# Allegro board GroupV_PCBLayout_EDP2.brd
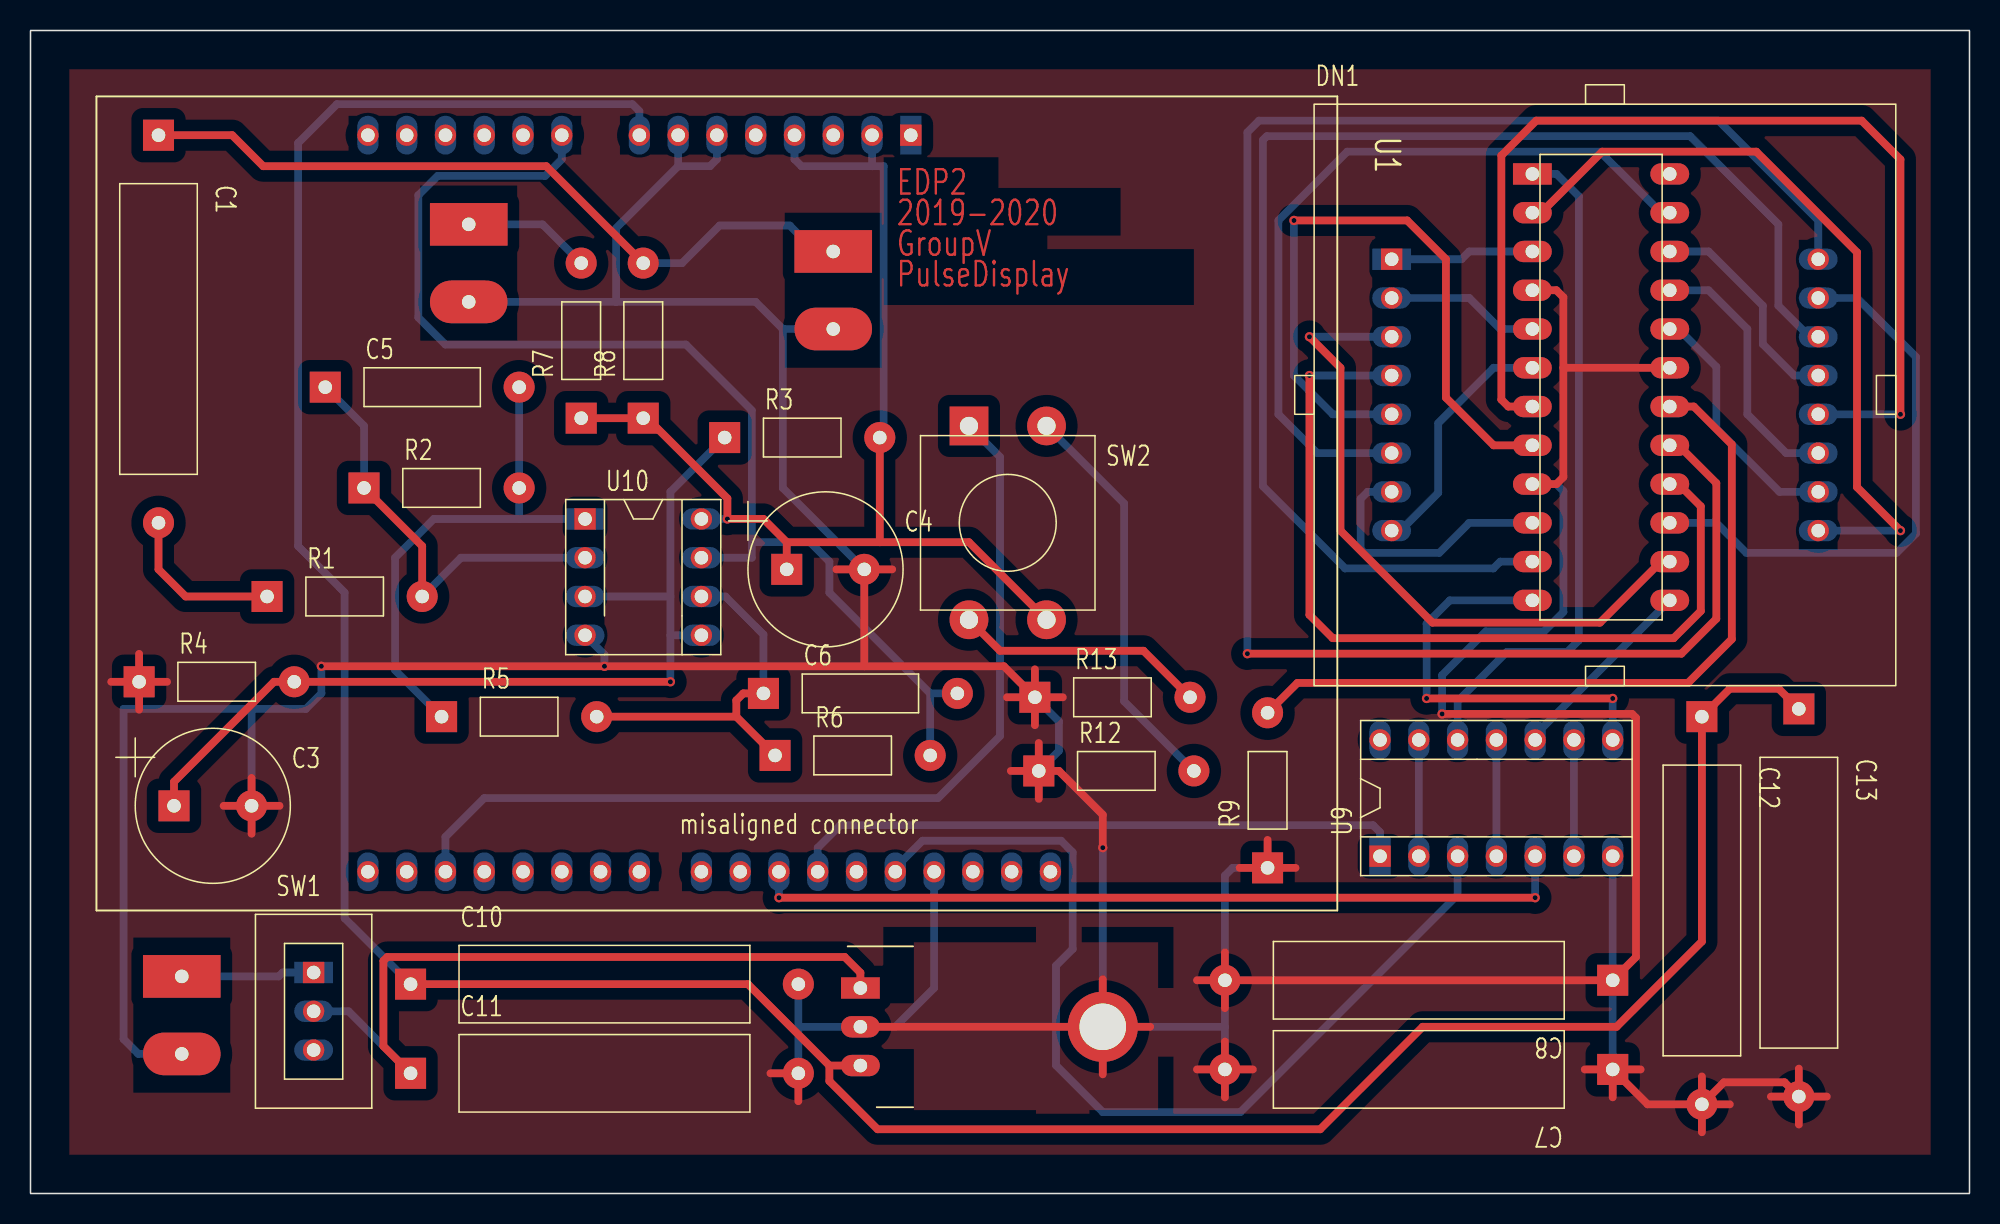
[diagram p0: board, top side]
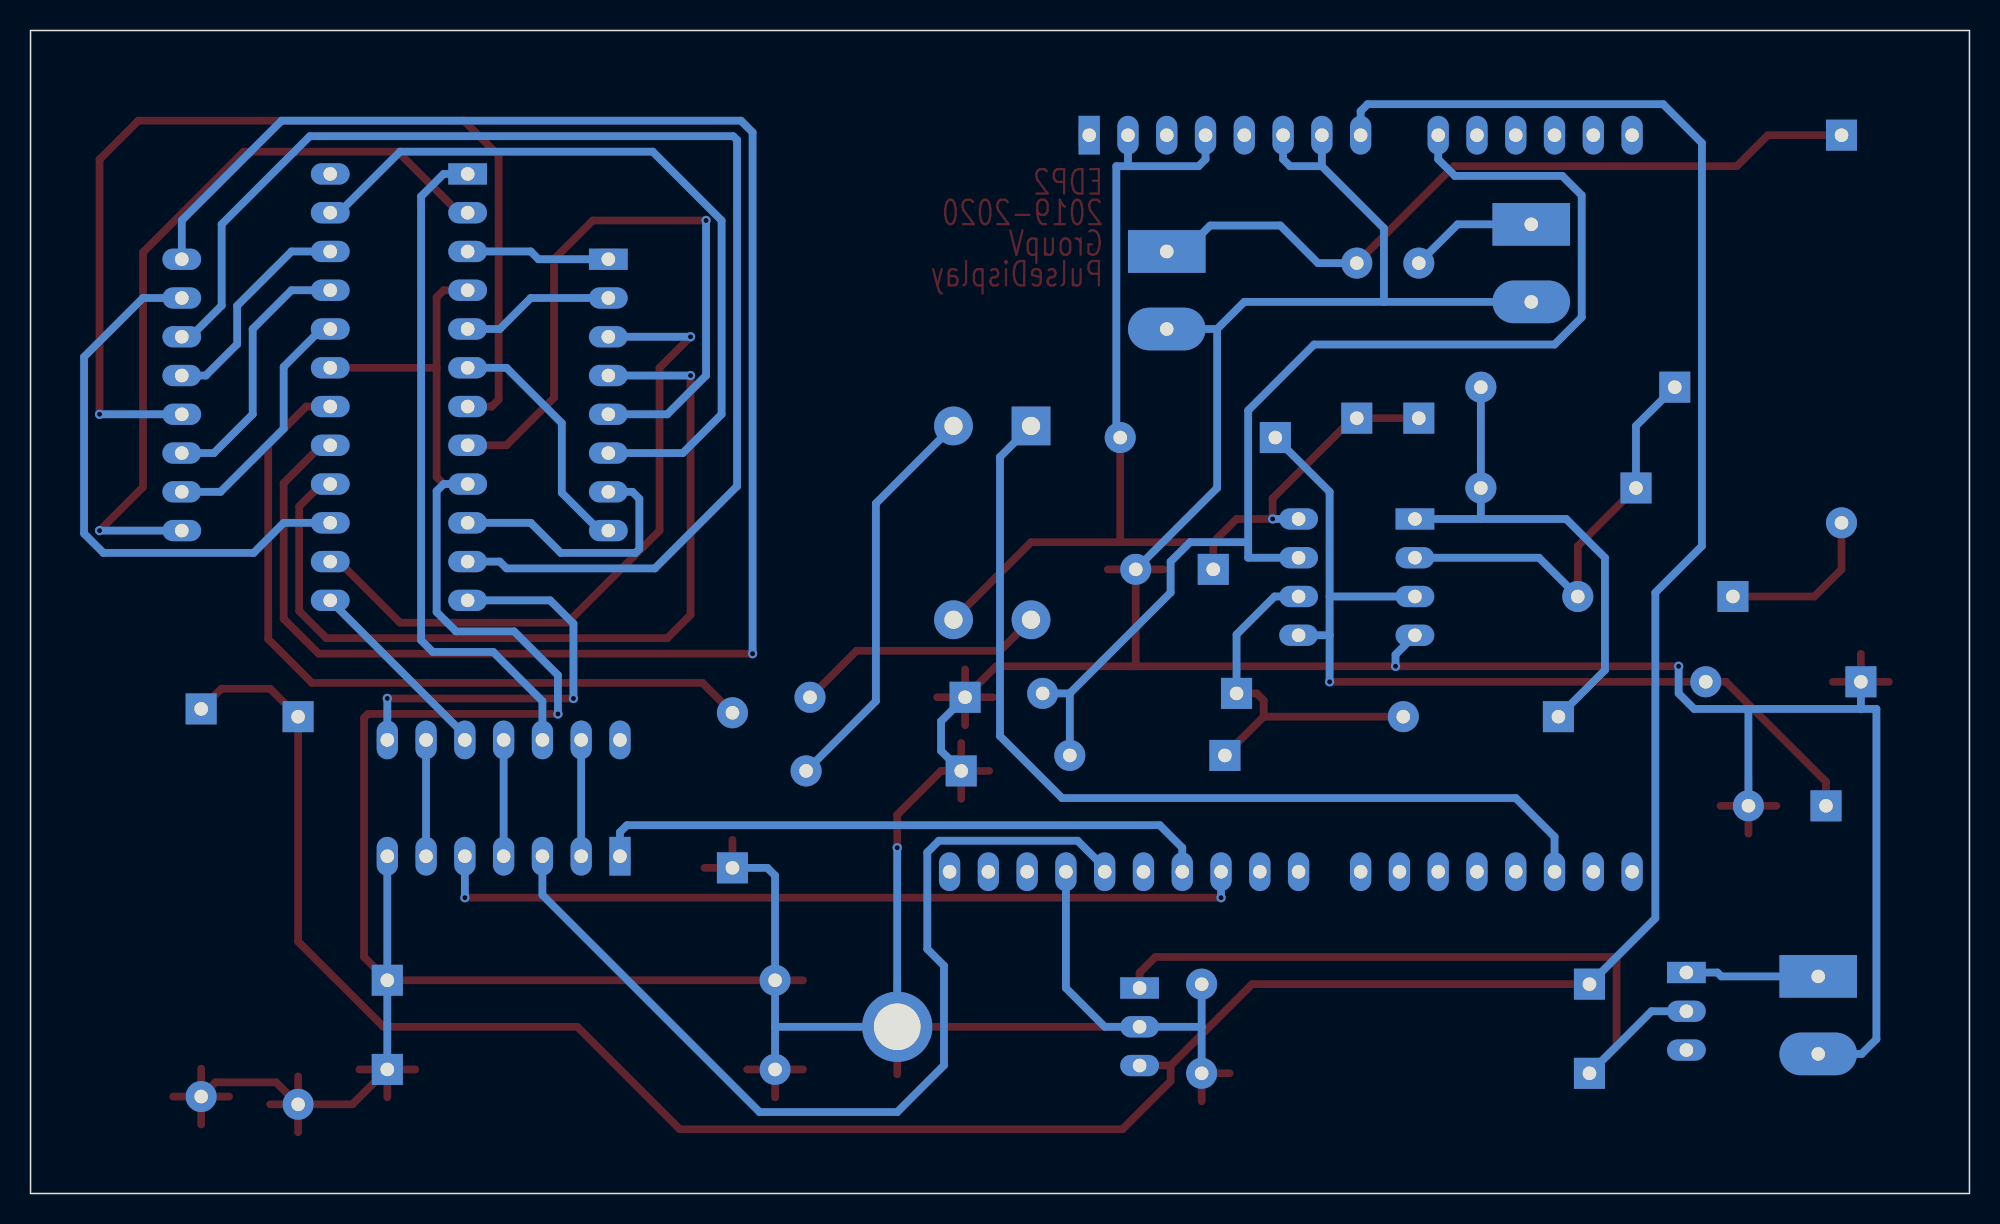
[diagram p1: board, bottom side, seen from below]

Outline 127 x 76.2 mm; copper layers: TOP, BOTTOM. Coordinates in mm from the lower left corner of the outline.
Outline path: rectangle 0,0 127,76.2

## Design rules (mm)
constraint set DEFAULT: min track width 0.508

## Placement (name value [footprint] x y rotation side)
C1  1u  [GU-RC1000]  8.38 69.34 270 top
C3  220U  [GU-CAPCYL200]  9.4 25.4 0 top
C4  220U  [GU-CAPCYL200]  49.53 40.89 0 top
C5  1n  [GU-RC500]  19.3 52.83 0 top
C6  1n  [GU-RC500]  48.01 32.77 0 top
C7  1n  [GU-RC1000]  103.63 8.13 180 top
C8  1n  [GU-RC1000]  103.63 13.97 180 top
C10  220u  [GU-RC1000]  24.89 13.72 0 top
C11  0.1u  [GU-RC1000]  24.89 7.87 0 top
C12  0.1u  [GU-RC1000]  109.47 31.24 270 top
C13  10u  [GU-RC1000]  115.82 31.75 270 top
DN1  LedArr-8x8  [GU-DIPLONG16-1100]  89.15 61.21 0 top
J1  BATTERY 9V  [GU-TERMINAL2-200]  9.91 14.22 0 top
J2  LED  [GU-TERMINAL2-200]  28.7 63.5 0 top
J3  PhotoDiode  [GU-TERMINAL2-200]  52.58 61.72 0 top
R1  10k  [GU-RC400]  15.49 39.12 0 top
R2  50k  [GU-RC400]  21.84 46.23 0 top
R3  100k  [GU-RC400]  45.47 49.53 0 top
R4  100k  [GU-RC400]  7.11 33.53 0 top
R5  1k  [GU-RC400]  26.92 31.24 0 top
R6  50k  [GU-RC400]  48.77 28.7 0 top
R7  100  [GU-RC400]  36.07 50.8 90 top
R8  10k  [GU-RC400]  40.13 50.8 90 top
R9  1k  [GU-RC400]  81.03 21.34 90 top
R12  1k  [GU-RC400]  66.04 27.69 0 top
R13  1k  [GU-RC400]  65.79 32.51 0 top
SW1  SW_SL_SPDT  [GU-SW-SLIDE-SPDT]  18.54 14.48 0 top
SW2  SW PUSHBUTTON-SPST-2/SM  [GU-PUSH52]  61.47 50.29 0 top
U1  FRDM-KL25Z-Arduino  [GU-FRDM-ARDUINO]  57.66 69.34 270 top
U5  LM2937  [GU-LM2937]  54.36 13.46 0 top
U8  MAX7221  [GU-DIP24]  102.87 52.83 0 top
U9  74HCT04  [GU-DIPSOCK14]  88.39 22.1 90 top
U10  MCP6292  [GU-DIPSOCK8]  36.32 44.2 0 top

## Library data of the parts
C1 C5-C8 = C
C3 C4 = C_elect_0
C10-C13 = CAPACITOR NON-POL
DN1 = LedArr-8x8
J1-J3 = CON2: User Part Number: TERMINAL2-200
R1-R9 R12 R13 = R
SW1 = SW_SL_SPDT
SW2 = SW PUSHBUTTON-SPST-2/SM
U1 = FRDM-KL25Z-Arduino
U5 = LM2937_0
U8 = MAX7221_5
U9 = 74HCT04
U10 = MCP6292

## Footprints (pads in the part's own frame, mm; a bottom-side part is the same pattern mirrored in y, then rotated)
GU-CAPCYL200
  rect 2.032x2.032 hole 0.889: 1(0,0)
  round 2.032 hole 0.889: 2(5.08,0)
GU-DIP24
  rect 2.54x1.397 hole 0.889: 1(-4.5,13.97)
  oval 2.54x1.397 hole 0.889: 2(-4.5,11.43) 3(-4.5,8.89) 4(-4.5,6.35) 5(-4.5,3.81) 6(-4.5,1.27) 7(-4.5,-1.27) 8(-4.5,-3.81) 9(-4.5,-6.35) 10(-4.5,-8.89) 11(-4.5,-11.43) 12(-4.5,-13.97) 13(4.5,-13.97) 14(4.5,-11.43) 15(4.5,-8.89) 16(4.5,-6.35) 17(4.5,-3.81) 18(4.5,-1.27) 19(4.5,1.27) 20(4.5,3.81) 21(4.5,6.35) 22(4.5,8.89) 23(4.5,11.43) 24(4.5,13.97)
GU-DIPLONG16-1100
  rect 1.397x1.397 hole 0.889: 1(0,0)
  round 1.397 hole 0.889: 2(0,-2.54) 3(0,-5.08) 4(0,-7.62) 5(0,-10.16) 6(0,-12.7) 7(0,-15.24) 8(0,-17.78) 9(27.94,-17.78) 10(27.94,-15.24) 11(27.94,-12.7) 12(27.94,-10.16) 13(27.94,-7.62) 14(27.94,-5.08) 15(27.94,-2.54) 16(27.94,0)
GU-DIPSOCK8
  rect 1.397x1.397 hole 0.889: 1(0,0)
  round 1.397 hole 0.889: 2(0,-2.54) 3(0,-5.08) 4(0,-7.62) 5(7.62,-7.62) 6(7.62,-5.08) 7(7.62,-2.54) 8(7.62,0)
GU-DIPSOCK14
  rect 1.397x1.397 hole 0.889: 1(0,0)
  round 1.397 hole 0.889: 2(0,-2.54) 3(0,-5.08) 4(0,-7.62) 5(0,-10.16) 6(0,-12.7) 7(0,-15.24) 8(7.62,-15.24) 9(7.62,-12.7) 10(7.62,-10.16) 11(7.62,-7.62) 12(7.62,-5.08) 13(7.62,-2.54) 14(7.62,0)
GU-FRDM-ARDUINO
  rect 1.397x1.397 hole 0.889: 1(0,0)
  round 1.397 hole 0.889: 2(0,-2.54) 3(0,-5.08) 4(0,-7.62) 5(0,-10.16) 6(0,-12.7) 7(0,-15.24) 8(0,-17.78) 9(0,-22.86) 10(0,-25.4) 11(0,-27.94) 12(0,-30.48) 13(0,-33.02) 14(0,-35.56) 15(48.26,-35.56) 16(48.26,-33.02) 17(48.26,-30.48) 18(48.26,-27.94) 19(48.26,-25.4) 20(48.26,-22.86) 21(48.26,-20.32) 22(48.26,-17.78) 23(48.26,-13.716) 24(48.26,-11.176) 25(48.26,-8.636) 26(48.26,-6.096) 27(48.26,-3.556) 28(48.26,-1.016) 29(48.26,1.524) 30(48.26,4.064) 31(48.26,6.604) 32(48.26,9.144)
GU-LM2937
  rect 2.54x1.397 hole 0.889: 1(0,0)
  oval 2.54x1.397 hole 0.889: 2(0,-2.54) 3(0,-5.08)
  round 4.6 hole 3.05: 4(15.875,-2.54)
GU-PUSH52
  rect 2.54x2.54 hole 1.194: 1(0,0)
  round 2.54 hole 1.194: 2(5.08,0) 3(0,-12.7) 4(5.08,-12.7)
GU-RC400
  rect 2.032x2.032 hole 0.889: 1(0,0)
  round 2.032 hole 0.889: 2(10.16,0)
GU-RC500
  rect 2.032x2.032 hole 0.889: 1(0,0)
  round 2.032 hole 0.889: 2(12.7,0)
GU-RC1000
  rect 2.032x2.032 hole 0.889: 1(0,0)
  round 2.032 hole 0.889: 2(25.4,0)
GU-SW-SLIDE-SPDT
  rect 1.397x1.397 hole 0.889: 1(0,0)
  round 1.397 hole 0.889: 2(0,-2.54) 3(0,-5.08)
GU-TERMINAL2-200
  rect 5.08x2.794 hole 0.889: 1(0,0)
  oval 5.08x2.794 hole 0.889: 2(0,-5.08)

## Nets
GND: C3.2(-) C4.2(-) C7.1 C7.2 C8.1 C8.2 C10.2 C11.2 C12.2 C13.2 J1.2 J2.2 J3.2 R4.1 R9.1 R12.1 R13.1 U1.6 U1.7 U1.29 U5.2 U5.4 U8.4 U8.9 U8.19(VCC) U9.7 U10.4
VCC: U9.14
N03961: C4.1 R3.2 R7.1 R8.1 SW2.4 U1.2 U1.4 U10.8
N04053: C3.1 R3.1 R4.2 U10.3 U10.5
N08137: C5.1 R1.2 R2.1 U10.2
N08145: C5.2 R2.2 R5.1 U10.1
N08157: C6.1 R5.2 R6.1 U10.6
N08161: C6.2 R6.2 U1.9 U10.7(OUT)
N08433: C1.2 R1.1
N08614: C1.1 J3.1 R8.2
N10280: J2.1 R7.2
N11771: R9.2 U8.18
N11778: U8.13 U9.10
N11791: U8.12 U9.8
N13184: U9.4 U9.11
N13188: U9.2 U9.13
N13195: U9.6 U9.9
N13202: U8.1 U9.12(Y)
N13214: U1.26 U9.1
N13218: U1.28 U9.3
N13222: U1.25 U9.5
N22090: C11.1 SW1.2 U5.1
N22979: C10.1 C12.1 C13.1 U1.8 U5.3(OUT)
N25169: DN1.16 U8.17
N25451: DN1.13 U8.22
N25464: DN1.3 U8.14
N25471: DN1.4 U8.16
N25478: DN1.10 U8.20
N25485: DN1.6 U8.23
N25492: DN1.11 U8.21
N25499: DN1.15 U8.15
N28309: J1.1 SW1.1
N29244: SW2.1 U1.17
N29260: R12.2 SW2.2
N29264: R13.2 SW2.3
N32702: DN1.9 U8.2
N32704: DN1.14 U8.11
N32706: DN1.8 U8.6
N32708: DN1.12 U8.7
N32710: DN1.1 U8.3
N32712: DN1.7 U8.10
N32714: DN1.2 U8.5
N32716: DN1.5(RA8) U8.8

Pads without a net: SW1 3; U1 1 3 5 10 11 12 13 14 15 16 18 19 20 21 22 23 24 27 30 31 32; U8 24

## Via types
v1: diameter 0.61, hole 0.33, TOP to BOTTOM, 16 vias

## Routing (per net, layer and track width the routed paths; a pad name or vN(x,y) marks a point on that pad's centre or on a via; arc(x,y) is an arc through that point)
GND: length 463.7
  TOP w0.508: 103.63,6.3 C7.1 ; C7.1 105.92,5.84 C12.2 ; C7.1 101.8,8.13 ; C7.1 105.46,8.13 ; C7.2 78.23,9.96 ; C7.2 80.06,8.13 ; C7.2 76.4,8.13 ; C7.2 78.23,6.3 ; R9.1 81.03,23.17 ; R9.1 79.2,21.34 ; R9.1 82.86,21.34 ; 65.79,30.68 R13.1 ; R13.1 67.62,32.51 ; R13.1 63.75,34.54 54.61,34.54 ; R13.1 65.79,34.34 ; R13.1 63.96,32.51 ; v1(19.05,34.54) v1(37.59,34.54) 54.61,34.54 ; U5.4 U5.2 ; U5.4 70.23,7.81 ; U5.4 70.23,14.04 ; U5.4 73.34,10.92 ; 12.65,25.4 C3.2 ; C3.2 14.48,27.23 ; C3.2 14.48,23.57 ; C3.2 16.31,25.4 ; 7.11,31.7 R4.1 ; R4.1 7.11,35.36 ; R4.1 5.28,33.53 ; R4.1 8.94,33.53 ; 78.23,12.14 C8.2 ; C8.2 76.4,13.97 ; C8.2 C8.1 105.16,15.49 105.16,31.17 104.9,31.42 v1(92.46,31.42) ; C8.2 78.23,15.8 ; 115.82,4.52 C13.2 ; C13.2 115.82,8.18 ; C13.2 113.99,6.35 ; C13.2 114.89,7.28 110.92,7.28 C12.2 ; C13.2 117.65,6.35 ; U8.9 99.94,46.48 100.4,46.94 100.4,54.1 ; R12.1 66.04,29.52 ; R12.1 64.21,27.69 ; R12.1 67.36,27.69 70.23,24.82 v1(70.23,22.66) ; R12.1 66.04,25.86 ; 109.47,4.01 C12.2 ; C12.2 111.3,5.84 ; C12.2 109.47,7.67 ; U8.19 100.4,54.1 ; 100.4,54.1 100.4,58.72 99.94,59.18 U8.4 ; 54.61,34.54 C4.2 ; C4.2 52.78,40.89 ; C4.2 56.44,40.89 ; 50.29,6.04 C11.2 48.46,7.87
  BOTTOM w0.508: 50.29,10.92 U5.2 56.64,10.92 59.18,13.46 U1.29 ; 50.29,10.92 C10.2 ; 50.29,10.92 C11.2 ; U1.6 44.96,67.77 44.5,67.31 42.42,67.31 ; v1(70.23,22.66) U5.4 78.23,10.92 ; J1.2 7.06,9.14 6.1,10.11 6.1,31.75 7.11,31.75 ; C4.2 49.28,46.23 49.28,56.64 ; C7.1 C8.1 U9.7 ; U1.7 42.42,67.31 ; 42.42,67.31 38.35,63.25 38.35,58.42 ; 78.23,10.92 C8.2 78.23,20.83 78.74,21.34 R9.1 ; 78.23,10.92 C7.2 ; U8.9 99.94,46.48 100.4,46.02 100.4,38.1 99.13,36.83 95.33,36.83 92.46,33.96 v1(92.46,31.42) ; 38.35,58.42 47.5,58.42 49.28,56.64 ; 38.35,58.42 J2.2 ; 14.48,31.75 18.03,31.75 19.05,32.77 v1(19.05,34.54) ; 14.48,31.75 7.11,31.75 ; 14.48,31.75 C3.2 ; R13.1 67.36,30.94 67.36,29.01 R12.1 ; 7.11,31.75 R4.1 ; J3.2 49.28,56.64 ; U10.4 37.59,35.31 v1(37.59,34.54)
N03961: length 74.6
  TOP w0.508: C4.1 49.53,42.67 ; 49.53,42.67 55.63,42.67 ; 49.53,42.67 48.01,44.2 v1(45.64,44.2) 45.64,45.54 40.39,50.8 R8.1 R7.1 ; 55.63,42.67 R3.2 ; 55.63,42.67 61.47,42.67 SW2.4
  BOTTOM w0.508: U1.4 50.04,67.77 50.5,67.31 55.12,67.31 ; U1.2 55.12,67.31 ; 55.12,67.31 55.88,67.31 55.88,49.78 R3.2 ; U10.8 v1(45.64,44.2)
N04053: length 61.9
  TOP w0.508: C3.1 9.4,26.97 15.95,33.53 R4.2 v1(41.91,33.53)
  BOTTOM w0.508: v1(41.91,33.53) 41.91,36.58 ; 41.91,36.58 41.91,39.12 ; 41.91,36.58 U10.5 ; 41.91,39.12 41.91,45.97 R3.1 ; 41.91,39.12 U10.3
N08137: length 28.1
  TOP w0.508: R2.1 25.65,42.42 R1.2
  BOTTOM w0.508: C5.1 21.84,50.29 R2.1 ; R1.2 28.19,41.66 U10.2
N08145: length 33.8
  BOTTOM w0.508: C5.2 R2.2 32,44.2 ; U10.1 32,44.2 ; 32,44.2 26.42,44.2 23.88,41.66 23.88,34.29 R5.1
N08157: length 24.7
  TOP w0.508: 46.23,31.24 46.23,32.31 46.69,32.77 C6.1 ; 46.23,31.24 R6.1 ; 46.23,31.24 R5.2
  BOTTOM w0.508: U10.6 45.52,39.12 48.01,36.63 C6.1
N08161: length 80.1
  BOTTOM w0.508: C6.2 58.93,32.77 ; 58.93,32.77 R6.2 ; 58.93,32.77 52.32,39.37 52.32,41.4 51.05,42.67 47.24,42.67 ; 47.24,42.67 47.24,51.31 42.93,55.63 27.18,55.63 25.4,57.4 25.4,65.41 26.67,66.67 33.71,66.67 34.8,67.77 U1.9 ; 47.24,42.67 47.24,41.66 U10.7
N08433: length 10.9
  TOP w0.508: C1.2 8.38,40.89 10.16,39.12 R1.1
N08614: length 49.4
  TOP w0.508: C1.1 13.21,69.34 15.24,67.31 33.78,67.31 R8.2
  BOTTOM w0.508: J3.1 51.44,61.72 49.73,63.42 45.14,63.42 42.67,60.96 R8.2
N10280: length 8.4
  BOTTOM w0.508: J2.1 33.53,63.5 R7.2
N11771: length 50.3
  TOP w0.508: U8.18 108.94,51.56 111.43,49.07 111.43,36.32 108.56,33.45 82.98,33.45 R9.2
N11778: length 12.8
  BOTTOM w0.508: U9.10 98.55,30.04 U8.13
N11791: length 27.4
  TOP w0.508: v1(91.44,32.44) v1(103.63,32.44)
  BOTTOM w0.508: U9.8 v1(103.63,32.44) ; U8.12 92.96,38.86 91.44,37.34 v1(91.44,32.44)
N13184: length 7.6
  BOTTOM w0.508: U9.11 U9.4
N13188: length 7.6
  BOTTOM w0.508: U9.13 U9.2
N13195: length 7.6
  BOTTOM w0.508: U9.9 U9.6
N13202: length 44.9
  BOTTOM w0.508: U9.12 93.47,32.26 96.7,35.48 100.66,35.48 101.42,36.25 101.42,65.33 99.94,66.8 U8.1
N13214: length 40.8
  BOTTOM w0.508: U1.26 51.56,22.66 53.04,24.13 87.93,24.13 88.39,23.67 U9.1
N13218: length 63.3
  BOTTOM w0.508: U9.3 93.47,19.56 79.25,5.33 70.23,5.33 67.17,8.4 67.17,14.92 68.26,16.02 68.26,22.35 67.5,23.11 58.42,23.11 56.64,21.34 U1.28
N13222: length 53.9
  TOP w0.508: v1(49.02,19.38) v1(98.55,19.38)
  BOTTOM w0.508: U1.25 v1(49.02,19.38) ; U9.5 v1(98.55,19.38)
N22090: length 48.9
  TOP w0.508: C11.1 23.11,9.65 23.11,15.24 23.37,15.49 53.33,15.49 54.36,14.47 U5.1
  BOTTOM w0.508: SW1.2 20.83,11.94 C11.1
N22979: length 202
  TOP w0.508: 52.32,8.38 46.99,13.72 C10.1 ; 52.32,8.38 52.32,7.37 55.48,4.21 84.47,4.21 91.19,10.92 103.89,10.92 109.47,16.51 C12.1 111.3,33.07 114.5,33.07 C13.1 ; 52.32,8.38 U5.3
  BOTTOM w0.508: U1.8 39.88,70.92 39.42,71.37 20.07,71.37 17.53,68.83 17.53,42.42 20.57,39.37 20.57,18.03 C10.1
N25169: length 121.7
  TOP w0.508: U8.17 107.94,49.02 110.42,46.55 110.42,37.66 108.13,35.37 v1(79.71,35.37)
  BOTTOM w0.508: DN1.16 117.09,63.75 110.55,70.29 80.47,70.29 79.71,69.53 v1(79.71,35.37)
N25451: length 14.6
  BOTTOM w0.508: U8.22 109.91,61.72 113.47,58.17 113.47,55.65 115.52,53.59 DN1.13
N25464: length 44.7
  TOP w0.508: U8.14 106.8,41.4 102.8,37.4 91.83,37.4 85.8,43.43 85.8,54.1 v1(83.77,56.13)
  BOTTOM w0.508: DN1.3 v1(83.77,56.13)
N25471: length 57.6
  TOP w0.508: U8.16 107.94,46.48 109.4,45.02 109.4,38.16 107.62,36.39 85.29,36.39 83.77,37.91 v1(83.77,53.59)
  BOTTOM w0.508: DN1.4 v1(83.77,53.59)
N25478: length 16.5
  BOTTOM w0.508: U8.20 107.94,56.64 110.42,54.17 110.42,50.11 114.55,45.97 DN1.10
N25485: length 50.3
  BOTTOM w0.508: U8.23 106.8,64.26 102.8,68.26 86.25,68.26 81.74,63.75 81.74,51.05 84.28,48.51 DN1.6
N25492: length 17.4
  BOTTOM w0.508: DN1.11 114.99,48.51 112.45,51.05 112.45,56.64 109.91,59.18 U8.21
N25499: length 37
  BOTTOM w0.508: DN1.15 119.63,58.67 123.49,54.81 123.49,43.24 122.22,41.97 112.39,41.97 110.42,43.94 U8.15
N28309: length 8.7
  BOTTOM w0.508: J1.1 16.26,14.22 16.51,14.48 SW1.1
N29244: length 62.5
  BOTTOM w0.508: U1.17 27.18,23.37 29.72,25.91 59.44,25.91 63.5,29.97 63.5,48.26 SW2.1
N29260: length 26.6
  BOTTOM w0.508: R12.2 71.63,32.26 71.63,45.21 SW2.2
N29264: length 16.6
  TOP w0.508: R13.2 72.9,35.56 63.5,35.56 SW2.3
N32702: length 50.4
  TOP w0.508: v1(122.48,43.43) 119.63,46.28 119.63,61.67 113.04,68.26 102.94,68.26 98.94,64.26 U8.2
  BOTTOM w0.508: DN1.9 v1(122.48,43.43)
N32704: length 87.8
  BOTTOM w0.508: U8.11 96.27,41.4 95.82,40.96 86.11,40.96 80.72,46.34 80.72,69.02 80.98,69.28 108.7,69.28 114.48,63.5 114.48,58.17 116.52,56.13 DN1.14
N32706: length 16.3
  BOTTOM w0.508: DN1.8 89.73,43.43 92.2,45.91 92.2,50.47 95.83,54.1 U8.6
N32708: length 68.4
  TOP w0.508: v1(122.48,51.05) 122.48,67.75 119.94,70.29 98.62,70.29 96.34,68.01 96.34,52.02 96.8,51.56 U8.7
  BOTTOM w0.508: DN1.12 v1(122.48,51.05)
N32710: length 9.4
  BOTTOM w0.508: DN1.1 93.73,61.21 94.23,61.72 U8.3
N32712: length 17.7
  BOTTOM w0.508: U8.10 94.23,43.94 92.27,41.97 87.38,41.97 87.12,42.23 87.12,45.52 87.58,45.97 DN1.7
N32714: length 10.1
  BOTTOM w0.508: U8.5 96.27,56.64 94.23,58.67 DN1.2
N32716: length 44.6
  TOP w0.508: U8.8 95.83,49.02 92.71,52.14 92.71,61.21 90.17,63.75 v1(82.75,63.75)
  BOTTOM w0.508: DN1.5 85.29,51.05 82.75,53.59 v1(82.75,63.75)

## Copper pours and planes (outline as drawn; the poured copper is in the pictures)
GND on TOP: 2.54,73.66 124.46,73.66 124.46,2.54 2.54,2.54 ; 7 cut-outs

## Text on the board
TOP: EDP2 | 2019-2020 | GroupV | PulseDisplay
